# Altium PCB honda_giraffe_bosch_comma.pcbdoc
Units mil, origin at the board's own origin, x right, y up, seen from the top; angles counter-clockwise.
Board outline 5282.99 x 2316 mil, 2 copper layers (Top Layer, Bottom Layer); 8 components, 16 nets, 68 pads, 36 vias.
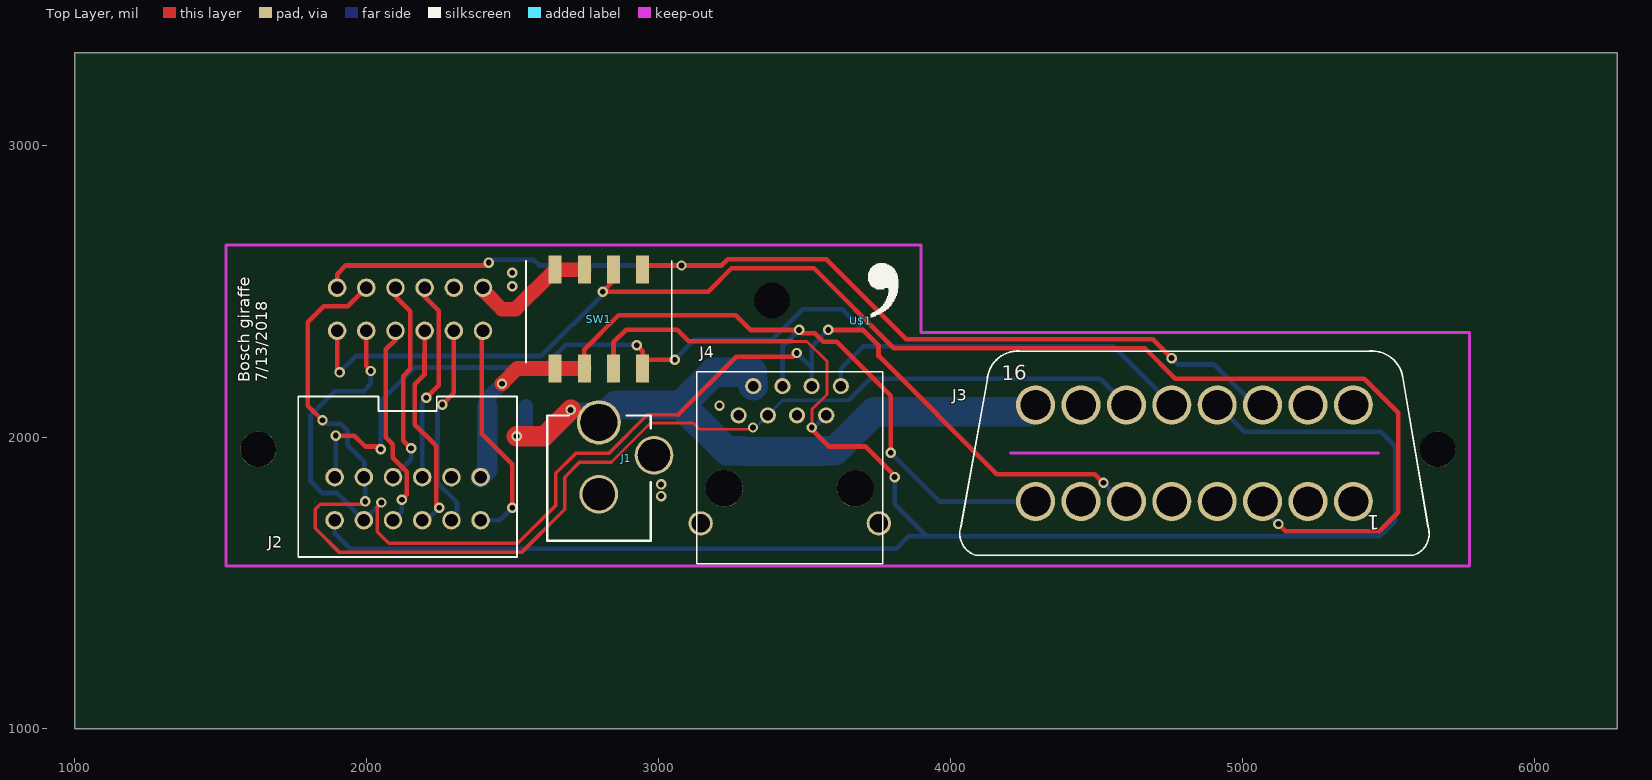
[diagram p0: Top Layer view]
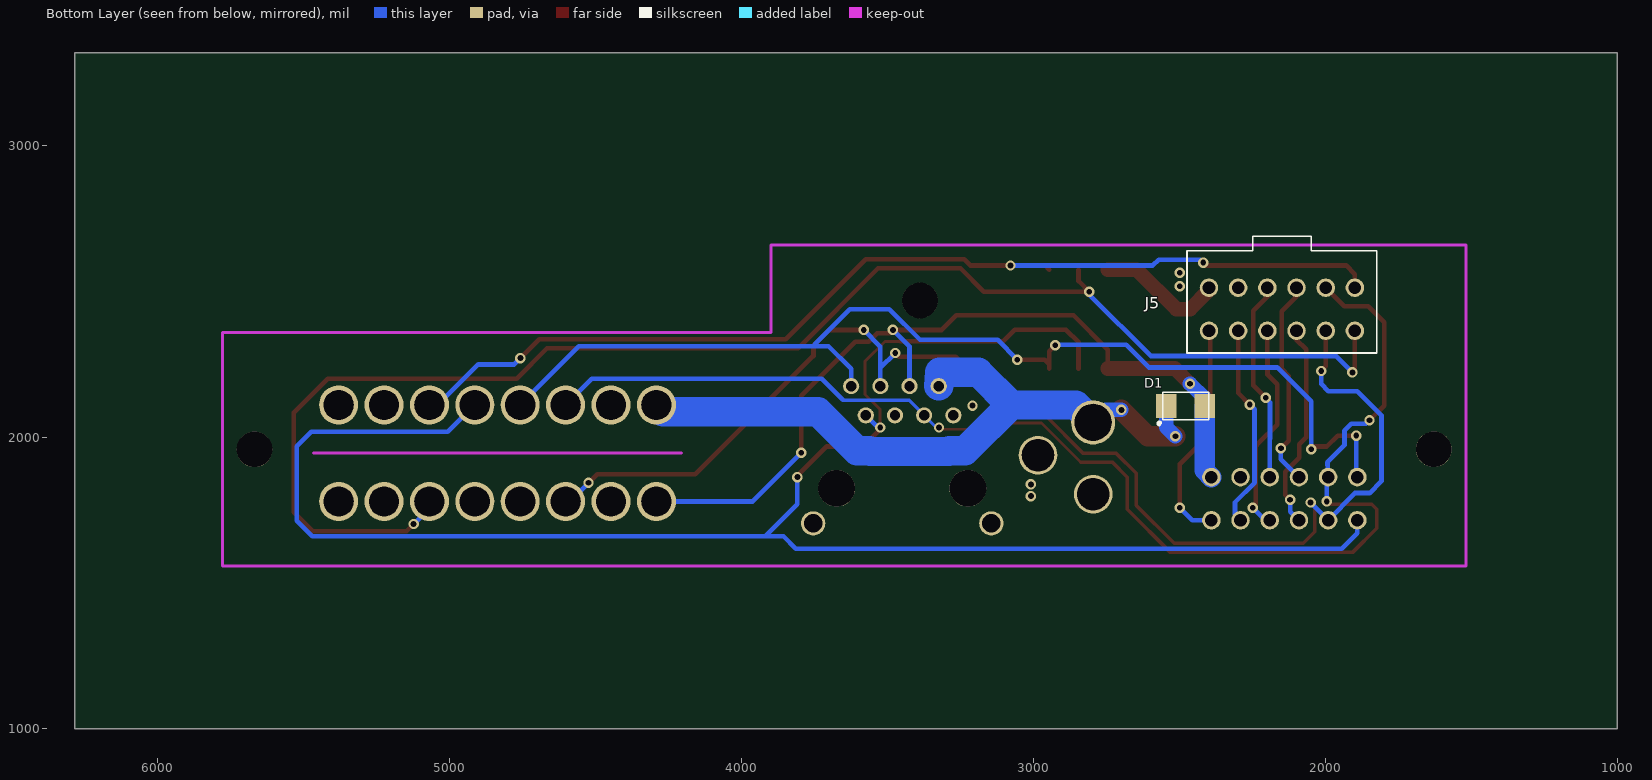
[diagram p1: Bottom Layer view, seen from below]

## Layer stack, top to bottom
Top Layer: signal copper (thickness not stored)
Dielectric: dielectric 12.6, FR-4, Dk 4.8
Bottom Layer: signal copper (thickness not stored)

## Board outline
6282.99,1000 1000,1000 1000,3316 6282.99,3316

## Components (designator, comment, footprint, x,y, rotation, side; value= is the part's Value field where it differs from the comment)
D1 "DIODE-" DO-214 2477.53,2106.03 r180 bottom
J1 "_" DCJACK_2MM_PTH 2794.85,1515 r0 top
J2 "RADAR" BOSCH_12_PIN_FEMALE 2139.73,1789.1 r0 top
J3 "OBDII-FEMALE-CUT" OBDII-FEMALE-MIDCUT 4835.4,1944.81 r0 top
J4 "VERT_RJ45-ASSMANN" RJ45-VERT 3448.78,1824.53 r0 top
J5 "CAM" BOSCH_12_PIN_MALE 2148,2438 r180 bottom
SW1 "2XDPST-CTS" 2-DPST 2794.85,2404.45 r0 top
U$1 "_" LOGO 3692,2399 r0 top

## Footprints (in the part's own frame and the unit in brackets; to place one, negate y for a bottom-side part, rotate by r counter-clockwise, add the part's x,y. Pads: shape width x height; smd on the part's side, far side on the other; paste and mask are expansions set on the pad)
2-DPST [mil]
  rect 44.5x96.1 smd: 1(-150,-169.29) 2(-50,-169.29) 3(50,-169.29) 4(150,-169.29) 5(150,169.3) 6(50,169.3) 7(-50,169.3) 8(-150,169.3)
  silkscreen extent -250,-150 250,200
BOSCH_12_PIN_FEMALE [mil]
  round 63.31 hole 43.3: 1(250,73.82) 2(150,73.82) 3(50,73.82) 4(-50,73.82) 5(-150,73.82) 6(-250,73.82) 7(250,-73.82) 8(150,-73.82) 9(50,-73.82) 10(-50,-73.82) 11(-150,-73.82) 12(-250,-73.82)
  silkscreen extent -375,-200 375,350
BOSCH_12_PIN_MALE [mil]
  round 63.31 hole 43.3: 1(-250,73.82) 2(-150,73.82) 3(-50,73.82) 4(50,73.82) 5(150,73.82) 6(250,73.82) 7(-250,-73.82) 8(-150,-73.82) 9(-50,-73.82) 10(50,-73.82) 11(150,-73.82) 12(250,-73.82)
  silkscreen extent -325,-150 325,250
DCJACK_2MM_PTH [mm]
  round 3.36 hole 2.8 slot 2.805 at 0 deg: GND(0,7.35)
  round 3.36 hole 2.8 slot 2.805 at 90 deg: GNDBREAK(4.8,10.75)
  round 3.84 hole 3.2 slot 3.205 at 0 deg: PWR(0,13.6)
  silkscreen extent -4.5,3.3 4.5,14.2
DO-214 [mm]
  rect 1.801x2.101 smd: 1(-1.7,0) 2(1.65,0)
  silkscreen extent -2.4,-1.6 2,1.2
LOGO [mil]
  silkscreen extent 26,12 129,196
OBDII-FEMALE-MIDCUT [mm]
  round 3.4 hole 2.6 slot 2.605 at 0 deg: 1(13.825,-4.2) 2(9.875,-4.2) 3(5.925,-4.2) 4(1.975,-4.2) 5(-1.975,-4.2) 6(-5.925,-4.2) 7(-9.875,-4.2) 8(-13.825,-4.2) 9(13.825,4.2) 10(9.875,4.2) 11(5.925,4.2) 12(1.975,4.2) 13(-1.975,4.2) 14(-5.925,4.2) 15(-9.875,4.2) 16(-13.825,4.2)
  Keep-Out Layer lines w0.254: -16,0 16,0
  silkscreen extent -20.42,-8.89 20.42,8.89
RJ45-VERT [mil]
  round 55.43 hole 35.44: 1(-175,250) 2(-125,350) 3(-75,250) 4(-25,350) 5(25,250) 6(75,350) 7(125,250) 8(175,350)
  round 82.99 hole 63: P$1(-305.11,-120.07) P$2(305.12,-120.07)
  round 125.98 hole 125.98 unplated: ""(-225,0) ""(225,0)
  silkscreen extent -318,-258 318,400

## Free pads (board coordinates)
  round 122.04 hole 122.04 unplated: ""(1628,1958) ""(3388,2468) ""(5667.99,1958)

## Via types
v1: diameter 35.69, hole 19.68, Top Layer to Bottom Layer, 36 vias

## Nets (pads, with @x,y where several pads share a name; then routed paths per layer and width w, separated by ;. In a path a pad name is that pad's centre, name@x,y a point inside that pad or via, vN(x,y) a via of type N, cw(c..) or ccw(c..) an arc to the next point about the centre after c; other vN are vias at no path point)
12VIN: D1.1 J1.PWR J3.16 J4.2 | length 2446.5
  Top Layer w70: v1(2513,2003) 2608,2003 v1(2698,2093)
  Bottom Layer w50: v1(2513,2003) 2544.45,2034.46 D1.1 ; v1(2698,2093) 2752.28,2093 J1.PWR
  Bottom Layer w70: J1.PWR@2793.67,2050.43 J1.PWR
  Bottom Layer w100: J1.PWR 2854.58,2110.16 3076.54,2110.16 ; J4.2 3321.42,2222.17 3188.55,2222.17 3076.54,2110.16 ; J3.16 4268.02,2087.08 3737.45,2087.08 3603.37,1953 3561.52,1953 3558.66,1950.13 3288.71,1950.13 3285.84,1953 3233.71,1953 3076.54,2110.16
CAN_ACC_H: J2.12 J3.12 J4.7 SW1.3 | length 6470.8
  Top Layer w10: 3455.24,2328 3508,2328 3576.07,2259.93 3576.07,2146.07 3524.34,2094.35 v1(3524.34,2032.98)
  Top Layer w16: SW1.3 2844.85,2324.85 2888,2368 3063,2368 3103,2328 3455.24,2328 3456.08,2328.84 ; v1(3524.34,2032.98) 3524.34,2026.65 3583,1968 3708,1968 3808,1868 v1(3808,1863)
  Bottom Layer w16: J2.12 1889.73,1671.27 1943,1618 3813,1618 3855.63,1660.63 3918,1660.63 ; v1(3524.34,2032.98) 3532.22,2032.98 J4.7 ; v1(3808,1863) 3808,1770.63 3918,1660.63 ; J3.12 5005.32,2018 5472.99,2018 5522.99,1968 5522.99,1713 5470.62,1660.63 3918,1660.63
CAN_ACC_L: J2.6 J3.13 J4.8 SW1.4 | length 3789.7
  Top Layer w16: v1(1893.1,2005.14) 1957.02,2005.14 1994.32,1967.84 2038.16,1967.84 v1(2048,1958) ; v1(2924.73,2314.49) 2944.85,2294.37 SW1.4 2944.85,2249.37 2960.86,2265.38 v1(3054.61,2265.38)
  Bottom Layer w16: J2.6 1893.1,1863.49 v1(1893.1,2005.14) ; v1(2048,1958) 2048,2122.96 2163.75,2238.71 2604.69,2238.71 2681.86,2315.87 2923.34,2315.87 v1(2924.73,2314.49) ; v1(3054.61,2265.38) 3122.23,2333 3388,2333 3493,2438 3628,2438 3748,2318 3748,2311.44 ; J4.8 3623.78,2233.79 3701.44,2311.44 3748,2311.44 ; J3.13 4556.36,2311.44 3748,2311.44
CAN_CAM_H: J3.3 J5.12 SW1.6 | length 5116
  Top Layer w16: J5.12 1898,2229.99 v1(1906.48,2221.51) v1@1901.94,2226.05 ; SW1.6 2844.85,2534.85 v1(2808,2498) 3169.17,2498 3249.17,2578 3531.84,2578 3805.84,2304 4665.89,2304 4769.79,2200.09 5416.94,2200.09 5532.99,2084.04 5532.99,1743 5467.99,1678 5147.16,1678 v1(5122.99,1702.17)
  Bottom Layer w16: v1(1906.48,2221.51) 1962.96,2278 2598,2278 2808,2488 v1(2808,2498) ; J3.3 5068.66,1756.5 v1(5122.99,1702.17)
CAN_CAM_L: J3.11 J5.6 SW1.5 | length 3600.2
  Top Layer w16: J5.6 1898,2558 1928,2588 2408,2588 v1(2418,2598) ; SW1.5 2959.1,2588 v1(3078,2588) 3215.33,2588 3236.33,2609 3574,2609 3848,2335 4692.65,2335 v1(4757.05,2270.6)
  Bottom Layer w16: v1(2418,2598) 2428,2608 2570.48,2608 2590.48,2588 v1(3078,2588) ; v1(4757.05,2270.6) 4778.8,2248.84 4901.65,2248.84 5040.33,2110.16 J3.11
CAN_MAIN_H: J2.11 J3.6 J4.6 J5.11 | length 4521.4
  Top Layer w12: v1(2050.01,1775.99) 2035.08,1761.05 2035.08,1675.92 2075.15,1635.85 2517.01,1635.85 2647,1765.84 2647,1875.84 2715.16,1944 2828.17,1944 2960.17,2076 3066,2076
  Top Layer w16: J5.11 1998,2242.25 v1(2013.75,2226.5) ; 3066,2076 3265.25,2275.25 3460.25,2275.25 v1(3473,2288) ; v1(3580.76,2367.16) 3698.84,2367.16 3753,2313 3753,2278 4157.99,1873 4494.17,1873 v1(4523.58,1843.59)
  Bottom Layer w16: v1(2013.75,2226.5) 2013.75,2182.01 1989.22,2157.49 1889.73,2157.49 1807.16,2074.92 1807.16,1848.84 1847.73,1808.27 1899.11,1808.27 J2.11 2050.01,1775.56 v1(2050.01,1775.99) ; v1(3473,2288) 3523.78,2237.21 J4.6 3523.78,2310.18 v1(3580.76,2367.16) ; v1(4523.58,1843.59) 4587.71,1779.46 J3.6
CAN_MAIN_L: J2.5 J3.14 J4.3 J5.5 | length 4402.9
  Top Layer w10: 2836.77,1913 2971.77,2048 3118,2048 3139.18,2026.82 3316.82,2026.82 v1(3323,2033)
  Top Layer w12: v1(1994.33,1779.78) 1984.48,1769.94 1839.94,1769.94 1823,1753 1823,1688 1906.15,1604.85 2529.85,1604.85 2678,1753 2678,1863 2728,1913 2836.77,1913
  Top Layer w16: v1@1847.28,2058.72 v1(1848,2058) 1798,2108 1798,2393 1853,2448 1934.18,2448 J5.5
  Bottom Layer w10: v1(3323,2033) 3332.25,2033 J4.3
  Bottom Layer w12: J4.3 3425.07,2125.82 3650.81,2125.82 3653,2128
  Bottom Layer w16: v1(1848,2058) 1860.02,2045.98 1910.02,2045.98 1933.94,2022.06 1933.94,1972.06 1992.09,1913.9 J2.5 1994.33,1860.69 v1(1994.33,1779.78) ; 3653,2128 3725.09,2200.09 4512.2,2200.09 J3.14
GND: J1.GND J1.GNDBREAK J2.2 J3.4 J3.5 J4.1 J4.5 J5.2
  other v1: 3008,1798 3008,1838 3208,2108 2498,2516.66 2498,2562.72
IGN: D1.2 J2.1 J3.8 J4.4 SW1.1 SW1.2 | length 2924.6
  Top Layer w16: SW1.2 2744.85,2299.85 2862.15,2417.16 3263.84,2417.16 3313.84,2367.16 v1(3480.76,2367.16) ; v1@3480.76,2375.23 v1(3480.76,2367.16) ; v1(3794.67,1946.36) 3794.67,2141.32 3609.68,2326.31 3563.84,2326.31 3539.92,2350.24 3539.92,2351.07 3535,2356 3491.92,2356 v1(3480.76,2367.16)
  Top Layer w50: v1@2468.71,2188.71 v1(2463,2183) 2515.16,2235.16 SW1.1 SW1.2
  Bottom Layer w16: J4.4 3423.78,2310.18 v1(3480.76,2367.16) ; v1(3794.67,1946.36) 3961.58,1779.46 J3.8
  Bottom Layer w50: D1.2 2412.57,2132.57 v1(2463,2183)
  Bottom Layer w70: J2.1 2412.57,1885.76 D1.2
IGN': J5.1 SW1.7 SW1.8 | length 547.5
  Top Layer w50: J5.1 2398,2503 2463,2438 2509.1,2438 SW1.8 ; 2568,2496.9 SW1.8 ; SW1.7 SW1.8
NC3: J2.3 J5.3 | length 692.8
  Top Layer w16: J5.3 2197.21,2481.82 2246.03,2433 2246.03,2176.99 v1(2203.83,2134.79)
  Bottom Layer w16: J2.3 2188.94,2119.9 v1(2203.83,2134.79)
NC4: J2.4 J5.4 | length 717.1
  Top Layer w16: J5.4 2098,2482.6 2149.18,2431.42 2149.18,2233.59 2124.77,2209.18 2124.77,1988.26 v1(2151.52,1961.52)
  Bottom Layer w16: J2.4 2151.52,1923.92 v1(2151.52,1961.52)
NC7: J2.7 J5.7 | length 776.8
  Top Layer w16: J5.7 2394.06,2360.24 2394.06,2011.54 2498,1907.61 v1(2498,1758)
  Bottom Layer w16: J2.7 2455.28,1715.28 v1(2498,1758)
NC8: J2.8 J5.8 | length 707.3
  Top Layer w16: v1(2258.46,2111.46) 2298,2151 J5.8
  Bottom Layer w16: v1(2258.46,2111.46) 2241.72,2094.71 2241.72,1844.01 2308.86,1776.87 2308.86,1736.77 J2.8
NC9: J2.9 J5.9 | length 730.6
  Top Layer w16: J5.9 2197.21,2214.3 2164.14,2181.23 2164.14,2042.64 2228.39,1978.39 2234.6,1972.19 2238,1968.79 2238,1768 v1(2248,1758)
  Bottom Layer w16: J2.9 2205.28,1715.28 v1(2248,1758)
NC10: J2.10 J5.10 | length 711.9
  Top Layer w16: J5.10 2098.79,2334.18 2064.92,2300.31 2064.92,1998.84 2088.84,1974.92 2088.84,1929.16 2136.17,1881.83 2136.17,1801.81 v1(2120.05,1785.69)
  Bottom Layer w16: J2.10 2120.05,1744.81 v1(2120.05,1785.69)
pads on no net: J3.1 J3.2 J3.7 J3.9 J3.10 J3.15 J4. J4.P$1 J4.P$2

## Polygon pours and split planes (outlines as drawn)
GND on Bottom Layer (solid): 1518,2658 3898,2658 3898,2358 5777.99,2358 5777.99,1558 1518,1558
GND on Top Layer (solid): 1518,2658 3898,2658 3898,2358 5777.99,2358 5777.99,1558 1518,1558

## Silkscreen, mask and mechanical layers (free items; w line width, h text height)
Top Overlay:
  text "Bosch giraffe / 7/13/2018" at 1658,2188 h40 r90
Document:
  region: 1508,2758 3908,2758 3908,2808 1508,2808
  region: 1508,2758 1508,1508 1558,1508 1558,2758
  region: 1558,1508 1558,1608 5507.99,1608 5507.99,1508
  region: 5507.99,1508 5557.99,1508 5557.99,2358 5457.99,2358 5457.99,1508
  region: 3808,2808 3808,2308 3808,2258 5557.99,2258 5557.99,2308 5557.99,2358 3908,2358 3908,2808
  region: 1508,2808 3908,2808 3908,2758 1508,2758
  rectangle: 1508,1508 1558,2758
  rectangle: 1508,1508 5557.99,1608
  rectangle: 5457.99,1508 5557.99,2358
  rectangle: 3808,2258 5558,2358
  rectangle: 3808,2258 3908,2808
  rectangle: 1558,2758 3908,2808
  lines w16: 1508,1508 1558,1508 ; 1508,1508 1508,2758 ; 1508,1508 5507.99,1508 ; 1508,1508 1558,1558 ; 1508,2758 3908,2758 ; 1508,2758 1558,2758 1558,1508 ; 1508,2758 3908,2758 ; 1508,2758 1508,2808 ; 1508,2758 1508,2808 ; 1508,2808 3908,2808 ; 1508,2808 3908,2808 ; 1558,1508 1558,1558 ; 1558,1508 1608,1508 1558,1508 ; 1558,1508 1558,1558 ; 1558,1558 1558,1608 5507.99,1608 5507.99,1508 ; 3908,2758 3908,2808 ; 3908,2758 3908,2808 ; 3908,2808 3908,2358 5557.99,2358 ; 3908,2808 3808,2808 3808,2308 3808,2258 5557.99,2258 5557.99,2308 5557.99,2358 ; 5507.99,1508 5557.99,1508 ; 5507.99,1508 5557.99,1508 ; 5557.99,1508 5557.99,2358 ; 5557.99,1508 5457.99,1508 5457.99,2358 5557.99,2358
  text "*compatible with freeTheC pins soldered on TOP" at 4250.59,2349 h16

## Text inside footprints (layer, text, board x,y; h text height)
J1: Document "DC 2.0/2.1" at 2665.41,1565.01 h32 r2
J3: Top Overlay "1" at 5470.39,1731.78 h50 r180; Top Overlay "16" at 4174.62,2194.22 h50 r1